# Altium PCB BaseMod_V2.PcbDoc (part 2 of 2)
Units mm, origin at the board's own origin, x right, y up, seen from the top; angles counter-clockwise.
Board outline 100 x 94 mm, 2 copper layers (Top Layer, Bottom Layer), stack 1.069 mm thick; 165 components, 135 nets, 648 pads, 250 vias.
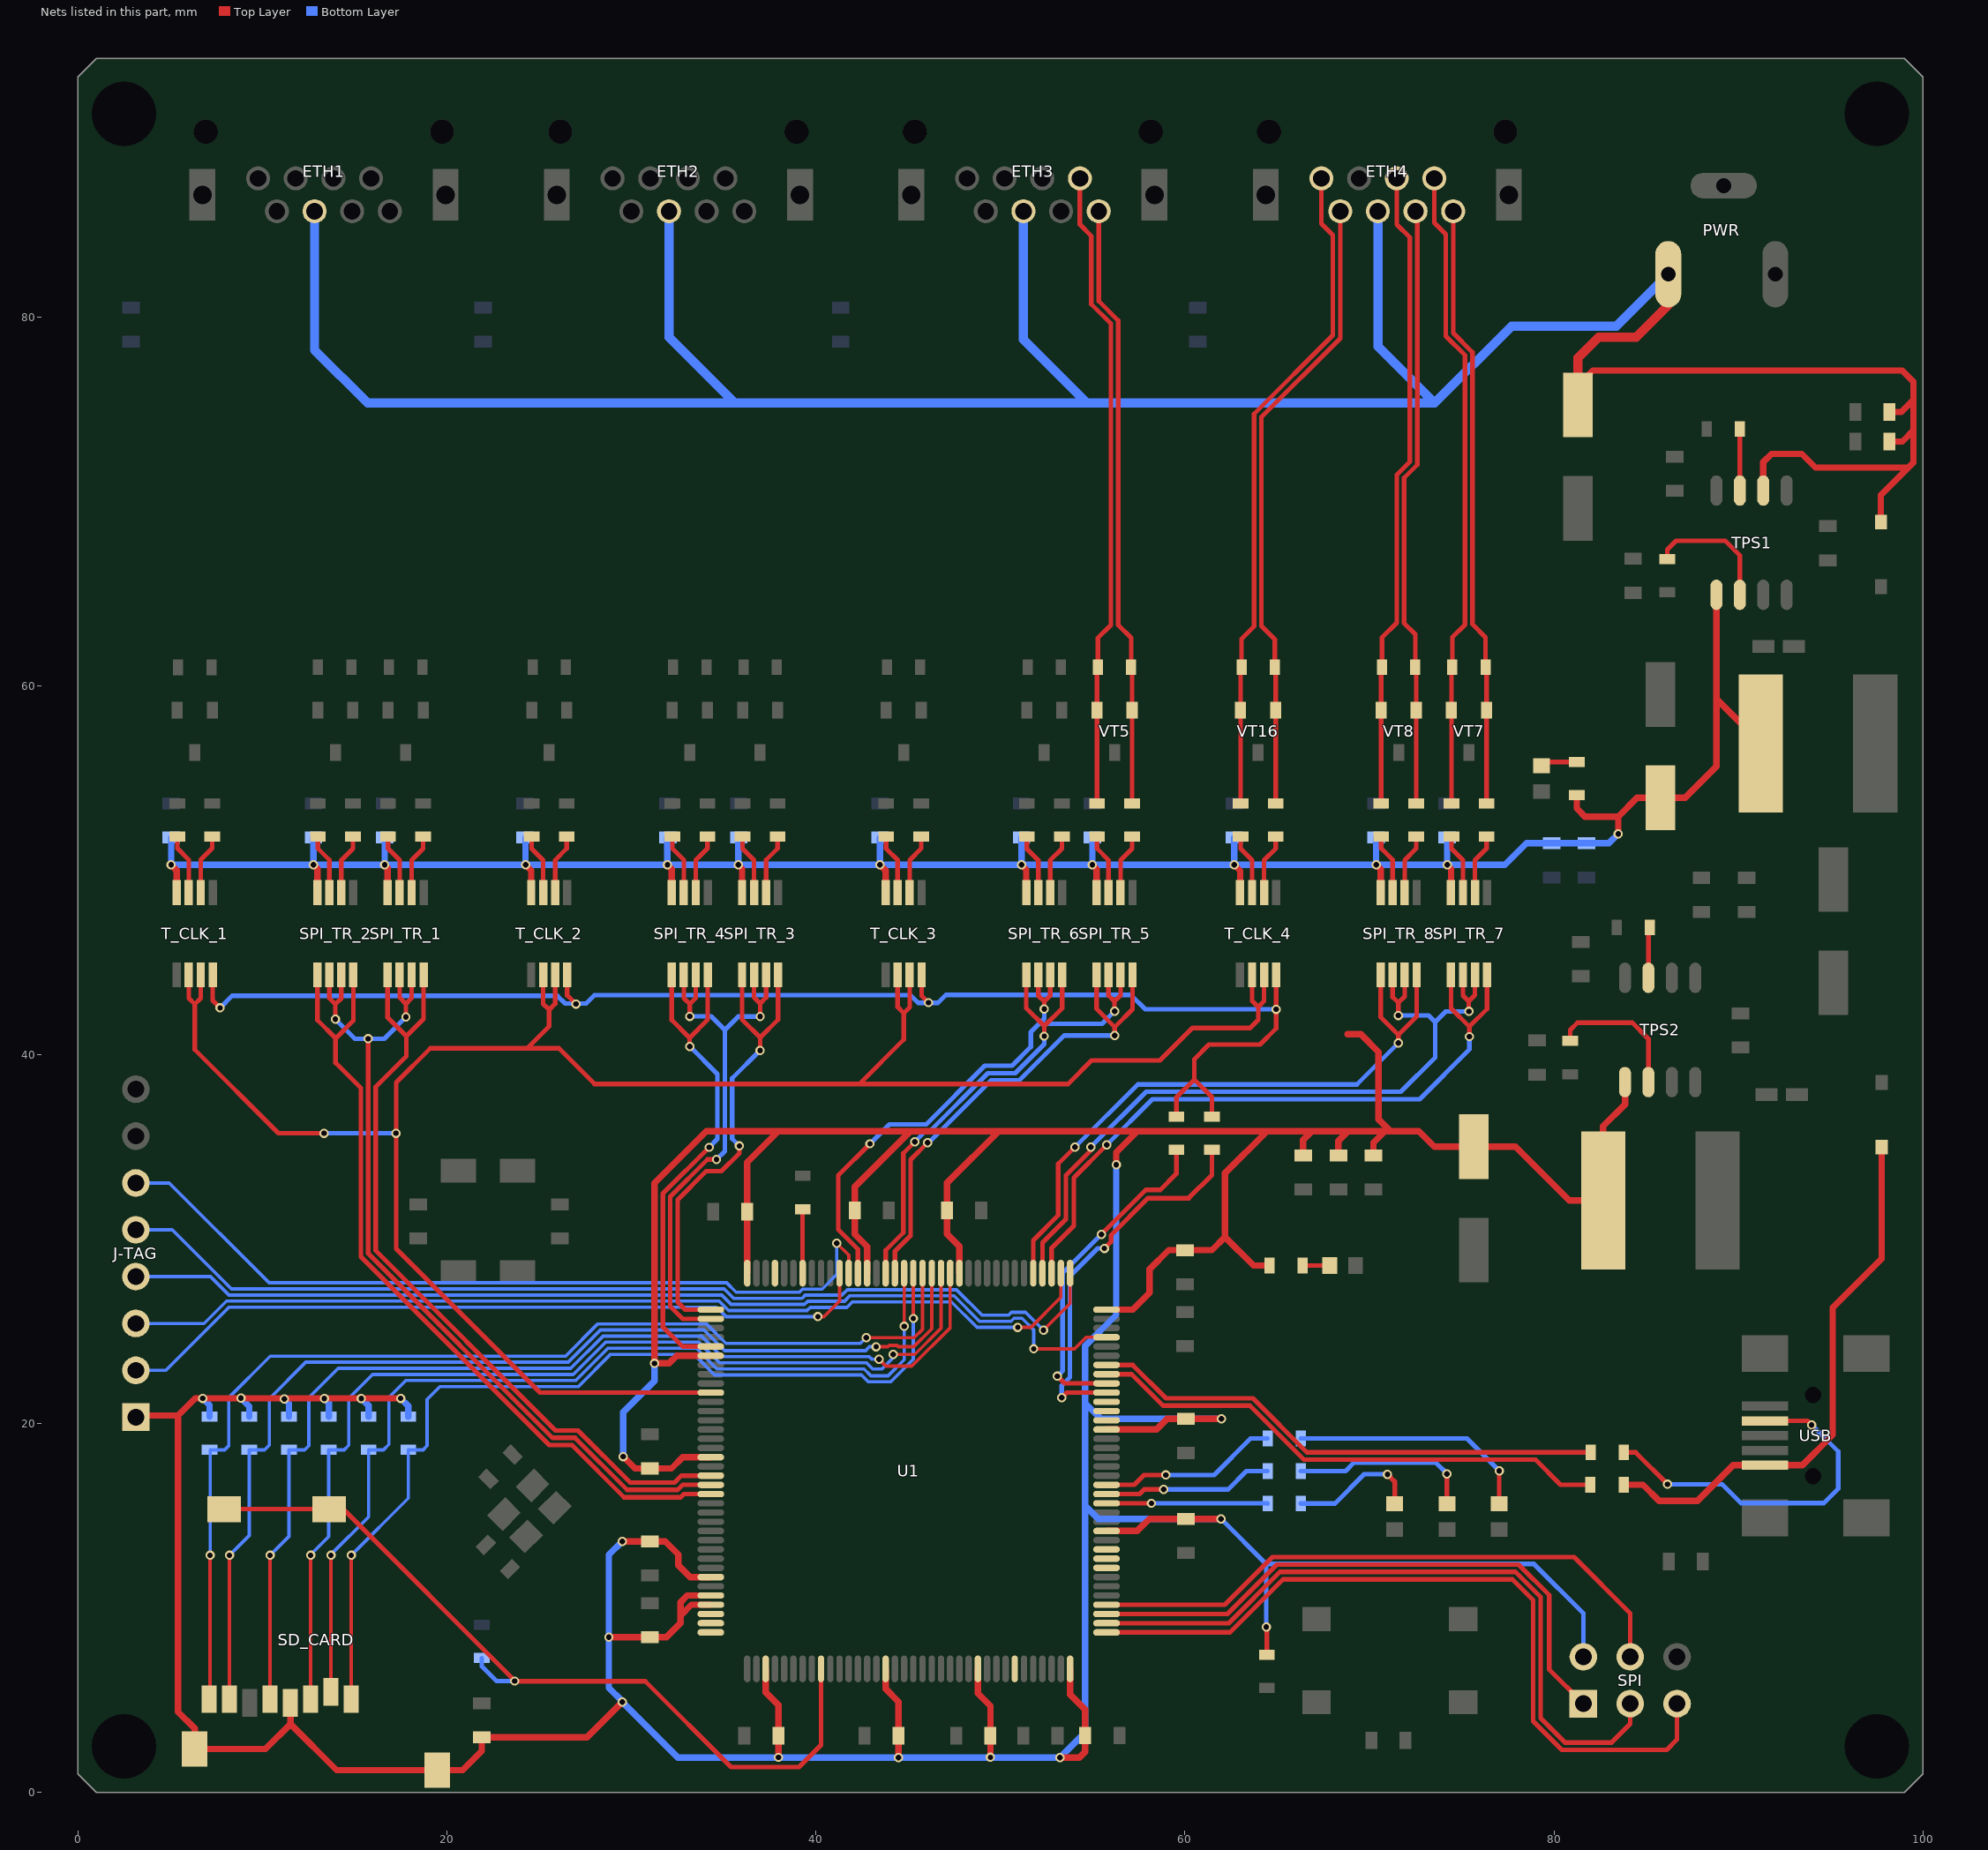
[diagram p2: the nets of this part, all layers, seen from the top]

## Via types
v1: diameter 0.5, hole 0.3, Top Layer to Bottom Layer, tented both sides, 250 vias

## Nets (pads, with @x,y where several pads share a name; then routed paths per layer and width w, separated by ;. In a path a pad name is that pad's centre, name@x,y a point inside that pad or via, vN(x,y) a via of type N, cw(c..) or ccw(c..) an arc to the next point about the centre after c; other vN are vias at no path point) (continued)
NetETH3_7: ETH3.7 Rt9.1 Rt21.2 VT5.2 | length 34.8
  Top Layer w0.25: ETH3.7@54.309,87.502 54.309,84.996 54.929,84.376 54.929,80.687 55.985,79.63 55.985,63.286 55.287,62.588 Rt21.2@55.287,60.999 ; Rt9.1@55.237,53.614 VT5.2@55.237,58.675 Rt21.2@55.237,60.949
NetETH3_8: ETH3.8 Rt10.1 Rt21.1 VT5.1 | length 32.8
  Top Layer w0.25: ETH3.8@55.329,85.722 55.329,80.852 56.385,79.796 56.385,63.289 57.087,62.587 Rt21.1@57.087,60.999 ; Rt10.1@57.137,53.614 VT5.1@57.137,58.675 Rt21.1@57.137,60.949
NetETH4_1: ETH4.1 Rt43.2 Rt48.2 VT16.2 | length 36.1
  Top Layer w0.25: Rt43.2@63.019,53.614 VT16.2@63.019,58.675 Rt48.2@63.019,60.949 ; Rt48.2@63.069,60.999 63.069,62.537 63.75,63.218 63.75,74.732 68.021,79.003 68.021,84.427 67.401,85.047 ETH4.1@67.401,87.502
NetETH4_2: ETH4.2 Rt44.2 Rt48.1 VT16.1 | length 34.1
  Top Layer w0.25: Rt48.1@64.869,60.999 64.869,62.519 64.15,63.238 64.15,74.566 68.421,78.837 ETH4.2@68.421,85.722 ; Rt44.2@64.919,53.614 VT16.1@64.919,58.675 Rt48.1@64.919,60.949
NetETH4_5: ETH4.5 Rt15.1 Rt24.2 VT8.2 | length 34.8
  Top Layer w0.25: Rt15.1@70.639,53.616 VT8.2@70.639,58.675 Rt24.2@70.639,60.949 ; Rt24.2@70.689,60.999 70.689,62.612 71.481,63.404 71.481,71.429 72.196,72.144 72.196,84.292 71.481,85.007 ETH4.5@71.481,87.502
NetETH4_6: ETH4.6 Rt16.1 Rt24.1 VT8.1 | length 32.6
  Top Layer w0.25: Rt24.1@72.489,60.999 72.489,62.779 71.881,63.387 71.881,71.263 72.596,71.978 72.596,85.627 ETH4.6@72.501,85.722 ; Rt16.1@72.539,53.616 VT8.1@72.539,58.675 Rt24.1@72.539,60.949
NetETH4_7: ETH4.7 Rt13.1 Rt23.2 VT7.2 | length 34.8
  Top Layer w0.25: ETH4.7@73.521,87.502 73.521,85.1 74.141,84.48 74.141,78.952 75.185,77.908 75.185,63.313 74.499,62.627 Rt23.2@74.499,60.999 ; Rt13.1@74.449,53.614 VT7.2@74.449,58.675 Rt23.2@74.449,60.949
NetETH4_8: ETH4.8 Rt14.1 Rt23.1 VT7.1 | length 32.8
  Top Layer w0.25: ETH4.8@74.541,85.722 74.541,79.118 75.585,78.074 75.585,63.335 76.299,62.621 Rt23.1@76.299,60.999 ; Rt14.1@76.349,53.614 VT7.1@76.349,58.675 Rt23.1@76.349,60.949
NetJ-TAG_2: J-TAG.2 U1.134 | length 41.6
  Top Layer w0.18: v1(40.107,25.794) 40.43,25.794 41.279,26.643 U1.134@41.279,28.149
  Bottom Layer w0.18: J-TAG.2@3.137,22.882 4.764,22.882 8.187,26.305 34.619,26.305 35.13,25.794 v1(40.107,25.794)
NetJ-TAG_3: J-TAG.3 U1.110 | length 53.6
  Top Layer w0.18: v1(50.94,25.213) 51.656,25.213 53.279,26.836 U1.110@53.279,28.149
  Bottom Layer w0.18: J-TAG.3@3.137,25.422 6.837,25.422 8.05,26.635 34.756,26.635 35.267,26.124 39.517,26.124 39.691,26.298 41.679,26.298 41.974,26.593 47.348,26.593 48.728,25.213 v1(50.94,25.213)
NetJ-TAG_4: J-TAG.4 U1.105 | length 55.6
  Top Layer w0.18: v1(51.805,24.048) 54.021,24.048 54.647,24.674 U1.105@55.754,24.674
  Bottom Layer w0.18: J-TAG.4@3.137,27.962 7.182,27.962 8.179,26.965 34.892,26.965 35.403,26.454 39.38,26.454 39.554,26.628 41.542,26.628 41.837,26.923 47.485,26.923 48.865,25.543 50.577,25.543 50.737,25.703 51.172,25.703 51.805,25.07 v1(51.805,24.048)
NetJ-TAG_5: J-TAG.5 U1.109 | length 55.7
  Top Layer w0.18: v1(52.334,25.063) 53.779,26.508 U1.109@53.779,28.149
  Bottom Layer w0.18: J-TAG.5@3.137,30.502 5.109,30.502 8.316,27.295 35.029,27.295 35.54,26.784 39.244,26.784 39.418,26.958 41.406,26.958 41.701,27.253 47.621,27.253 49.001,25.873 50.44,25.873 50.6,26.033 51.364,26.033 v1(52.334,25.063)
NetJ-TAG_6: J-TAG.6 U1.133 | length 44.4
  Top Layer w0.18: v1(41.131,29.772) 41.779,29.124 U1.133@41.779,28.149
  Bottom Layer w0.18: J-TAG.6@3.137,33.042 4.946,33.042 10.363,27.625 35.166,27.625 35.677,27.114 39.107,27.114 39.281,27.288 40.336,27.288 41.131,28.083 v1(41.131,29.772)
NetL1_1: L1.1 RL1.2 | length 7.1
  Top Layer w0.25: v1(70.981,17.247) 71.374,16.854 L1.1@71.374,15.655
  Bottom Layer w0.25: RL1.2@66.284,15.662 68.135,15.662 69.72,17.247 v1(70.981,17.247)
NetL2_1: L2.1 RL2.2 | length 10
  Top Layer w0.25: L2.1@74.206,15.655 v1(74.206,17.269)
  Bottom Layer w0.25: RL2.2@66.284,17.423 68.709,17.423 69.157,17.871 73.604,17.871 v1(74.206,17.269)
NetL3_1: L3.1 RL3.2 | length 13.3
  Top Layer w0.25: L3.1@77.037,15.655 v1(77.037,17.436)
  Bottom Layer w0.25: RL3.2@66.284,19.185 75.288,19.185 v1(77.037,17.436)
NetLp1_1: Lp1.1 Rp3.1 | length 1.7
  Top Layer w0.25: Lp1.1@79.525,55.857 Rp3.1@81.244,55.857
NetLp2_1: Lp2.1 Rp6.1 | length 1.5
  Top Layer w0.25: Rp6.1@66.382,28.568 Lp2.1@67.853,28.568
NetRb0_1: Rb0.1 U1.138 | length 3.5
  Top Layer w0.25: U1.138@39.279,28.149 Rb0.1@39.279,31.624
NetRd1_1: Rd1.1 SD_CARD.1 U1.126 | length 51.6
  Top Layer w0.18: SD_CARD.1@14.815,5.057 v1(14.815,12.855) ; v1(45.279,25.695) U1.126@45.279,28.149
  Bottom Layer w0.18: v1(14.815,12.855) 17.905,15.945 Rd1.1@17.905,18.572 18.706,18.572 18.927,18.793 18.927,21.306 19.624,22.003 27.121,22.003 28.868,23.75 33.384,23.75 34.504,22.63 42.463,22.63 42.833,22.26 44.052,22.26 45.279,23.487 45.279,24.773 v1(45.279,25.695)
NetRd2_1: Rd2.1 SD_CARD.2 U1.127 | length 52.4
  Top Layer w0.18: SD_CARD.2@13.715,5.457 v1(13.715,12.855) ; U1.127@44.779,28.149 44.788,28.14 v1(44.788,25.266)
  Bottom Layer w0.18: v1@13.715,12.904 15.75,14.939 Rd2.1@15.75,18.572 16.556,18.572 16.855,18.871 16.855,21.42 17.768,22.333 26.984,22.333 28.731,24.08 33.521,24.08 34.641,22.96 42.609,22.96 42.979,22.59 43.916,22.59 44.788,23.462 v1(44.788,25.266)
NetRd3_1: Rd3.1 SD_CARD.3 U1.123 | length 55.6
  Top Layer w0.18: SD_CARD.3@12.615,5.057 v1(12.615,12.855) ; v1(44.188,23.749) 45.363,23.749 46.779,25.165 U1.123@46.779,28.149
  Bottom Layer w0.18: v1@12.597,12.872 13.596,13.871 Rd3.1@13.596,18.572 14.427,18.572 14.675,18.82 14.675,21.366 15.972,22.663 26.848,22.663 28.595,24.41 33.657,24.41 34.777,23.29 42.746,23.29 43.084,22.952 43.581,22.952 44.188,23.559 v1(44.188,23.749)
NetRd4_1: Rd4.1 SD_CARD.5 U1.122 | length 58.3
  Top Layer w0.18: SD_CARD.5@10.415,5.057 v1(10.415,12.855) ; v1(43.423,23.487) 43.796,23.114 45.195,23.114 47.279,25.198 U1.122@47.279,28.149
  Bottom Layer w0.18: v1(10.415,12.855) 11.441,13.881 Rd4.1@11.441,18.572 12.288,18.572 12.512,18.796 12.512,21.4 14.105,22.993 26.711,22.993 28.458,24.74 33.794,24.74 34.914,23.62 42.901,23.62 43.034,23.487 v1(43.423,23.487)
NetRd5_1: Rd5.1 SD_CARD.7 U1.124 | length 59.1
  Top Layer w0.18: SD_CARD.7@8.215,5.057 v1(8.215,12.855) ; v1(43.266,24.16) 43.906,24.16 43.985,24.239 44.391,24.239 44.47,24.16 45.308,24.16 46.279,25.131 U1.124@46.279,28.149
  Bottom Layer w0.18: v1(8.215,12.855) 9.287,13.927 Rd5.1@9.287,18.572 10.107,18.572 10.37,18.835 10.37,21.345 12.348,23.323 26.574,23.323 28.321,25.07 33.931,25.07 35.051,23.95 42.689,23.95 42.899,24.16 v1(43.266,24.16)
NetRd6_1: Rd6.1 SD_CARD.8 U1.125 | length 60.3
  Top Layer w0.18: SD_CARD.8@7.038,5.134 7.161,5.257 v1(7.161,12.855) ; v1(42.723,24.651) 45.332,24.651 45.779,25.098 U1.125@45.779,28.149
  Bottom Layer w0.18: v1@7.132,12.724 v1@7.161,12.695 ; v1@7.165,12.855 7.165,18.563 7.951,18.572 8.179,18.8 8.179,21.414 10.418,23.653 26.438,23.653 28.185,25.4 34.067,25.4 35.126,24.341 42.414,24.341 v1(42.723,24.651)
NetRd7_2: Rd7.2 SD_CARD.10 U1.45 | length 45.3
  Top Layer w0.25: SD_CARD.10@7.925,15.357 SD_CARD.10@13.615,15.357 14.38,15.357 23.709,6.028 30.749,6.028 35.402,1.375 39.086,1.375 40.279,2.568 U1.45@40.279,6.699
  Bottom Layer w0.25: Rd7.2@21.889,7.284 21.889,6.839 22.692,6.036 v1(23.673,6.036)
NetRL1_1: RL1.1 U1.87 | length 8.7
  Top Layer w0.25: U1.87@55.754,15.674 v1(58.188,15.674)
  Bottom Layer w0.25: v1(58.188,15.674) 64.472,15.674 RL1.1@64.484,15.662
NetRL2_1: RL2.1 U1.88 | length 9.2
  Top Layer w0.25: U1.88@55.754,16.174 57.541,16.174 57.789,16.422 v1(58.851,16.422)
  Bottom Layer w0.25: v1(58.851,16.422) 62.336,16.422 63.337,17.423 RL2.1@64.484,17.423
NetRL3_1: RL3.1 U1.89 | length 9.8
  Top Layer w0.25: U1.89@55.754,16.674 57.254,16.674 57.789,17.209 v1(58.964,17.209)
  Bottom Layer w0.25: v1(58.964,17.209) 61.586,17.209 63.562,19.185 RL3.1@64.484,19.185
NetRm1_1: Rm1.1 U1.100 | length 18.2
  Top Layer w0.25: v1(53.089,22.565) 53.48,22.174 U1.100@55.754,22.174 ; v1(55.474,30.256) 57.886,32.668 58.665,32.668 59.537,33.54 Rm1.1@59.537,34.831
  Bottom Layer w0.25: v1(53.089,22.565) 53.369,22.845 53.369,28.151 v1(55.474,30.256)
NetRm1_2: Rm1.2 Rm2.2 T_CLK_1.4 T_CLK_2.4 T_CLK_3.4 T_CLK_4.4 | length 77.9
  Top Layer w0.25: T_CLK_1.4@7.307,44.328 7.307,42.929 v1(7.705,42.531) ; T_CLK_2.4@26.519,44.328 26.519,43.215 v1(26.992,42.742) ; T_CLK_3.4@45.732,44.328 45.732,43.189 v1(46.105,42.816) ; Rm1.2@59.537,36.631 59.537,37.672 60.51,38.645 ; Rm2.2@61.461,36.631 61.461,37.694 60.51,38.645 ; T_CLK_4.4@64.944,44.328 v1(64.944,42.455) 64.944,41.415 64.07,40.541 61.304,40.541 60.51,39.747 60.51,38.645
  Bottom Layer w0.25: v1(7.705,42.531) 8.358,43.184 25.986,43.184 26.403,42.767 v1@26.992,42.767 ; v1(26.992,42.742) v1@26.992,42.767 ; v1@46.105,42.804 45.537,42.804 45.12,43.221 27.996,43.221 27.542,42.767 v1@26.992,42.767 ; v1(46.105,42.816) v1@46.136,42.816 ; v1@46.136,42.804 46.615,42.804 47.043,43.232 57.073,43.232 57.85,42.455 v1(64.944,42.455)
NetRm2_1: Rm2.1 U1.99 | length 20.8
  Top Layer w0.25: v1(53.322,21.401) 53.595,21.674 U1.99@55.754,21.674 ; v1(55.635,29.494) 55.999,29.858 55.999,30.215 58,32.216 60.206,32.216 61.461,33.471 Rm2.1@61.461,34.831
  Bottom Layer w0.25: v1(53.322,21.401) 53.322,22.056 53.769,22.503 53.769,27.985 55.278,29.494 v1(55.635,29.494)
NetRp1_2: Rp1.2 TPS1.3 | length 3.3
  Top Layer w0.25: TPS1.3@90.08,70.579 Rp1.2@90.08,73.904
NetRp2_2: Rp2.2 TPS1.6 | length 7.1
  Top Layer w0.25: Rp2.2@86.148,66.86 86.148,67.373 86.628,67.853 89.292,67.853 90.08,67.065 TPS1.6@90.08,64.929
NetRp4_2: Rp4.2 TPS2.3 | length 2.7
  Top Layer w0.25: TPS2.3@85.125,44.161 Rp4.2@85.125,46.821
NetRp5_2: Rp5.2 TPS2.6 | length 7.7
  Top Layer w0.25: Rp5.2@80.888,40.741 80.888,41.334 81.28,41.726 84.251,41.726 85.125,40.852 TPS2.6@85.125,38.511
NetRt1_2: Rt1.2 SPI_TR_1.7 | length 3.3
  Top Layer w0.25: Rt1.2@16.812,51.814 16.812,51.169 17.437,50.544 SPI_TR_1.7@17.437,48.778
NetRt2_2: Rt2.2 SPI_TR_1.6 | length 3.3
  Top Layer w0.25: SPI_TR_1.6@18.087,48.778 18.087,50.542 18.712,51.167 Rt2.2@18.712,51.814
NetRt3_2: Rt3.2 SPI_TR_2.7 | length 3.3
  Top Layer w0.25: Rt3.2@13.004,51.814 13.004,51.177 13.627,50.554 SPI_TR_2.7@13.627,48.778
NetRt4_2: Rt4.2 SPI_TR_2.6 | length 3.3
  Top Layer w0.25: SPI_TR_2.6@14.277,48.778 14.277,50.543 14.904,51.17 Rt4.2@14.904,51.814
NetRt5_2: Rt5.2 SPI_TR_3.7 | length 3.3
  Top Layer w0.25: Rt5.2@36.024,51.814 36.024,51.163 36.649,50.538 SPI_TR_3.7@36.649,48.778
NetRt6_2: Rt6.2 SPI_TR_3.6 | length 3.3
  Top Layer w0.25: SPI_TR_3.6@37.299,48.778 37.299,50.552 37.924,51.177 Rt6.2@37.924,51.814
NetRt7_2: Rt7.2 SPI_TR_4.7 | length 3.3
  Top Layer w0.25: Rt7.2@32.216,51.814 32.216,51.178 32.839,50.555 SPI_TR_4.7@32.839,48.778
NetRt8_2: Rt8.2 SPI_TR_4.6 | length 3.3
  Top Layer w0.25: SPI_TR_4.6@33.489,48.778 33.489,50.542 34.116,51.169 Rt8.2@34.116,51.814
NetRt9_2: Rt9.2 SPI_TR_5.7 | length 3.3
  Top Layer w0.25: Rt9.2@55.237,51.814 55.237,51.171 55.862,50.546 SPI_TR_5.7@55.862,48.778
NetRt10_2: Rt10.2 SPI_TR_5.6 | length 3.3
  Top Layer w0.25: SPI_TR_5.6@56.512,48.778 56.512,50.543 57.137,51.168 Rt10.2@57.137,51.814
NetRt11_2: Rt11.2 SPI_TR_6.7 | length 3.3
  Top Layer w0.25: Rt11.2@51.429,51.814 51.429,51.167 52.052,50.544 SPI_TR_6.7@52.052,48.778
NetRt12_2: Rt12.2 SPI_TR_6.6 | length 3.3
  Top Layer w0.25: SPI_TR_6.6@52.702,48.778 52.702,50.538 53.329,51.165 Rt12.2@53.329,51.814
NetRt13_2: Rt13.2 SPI_TR_7.7 | length 3.3
  Top Layer w0.25: Rt13.2@74.449,51.814 74.449,51.168 75.074,50.543 SPI_TR_7.7@75.074,48.778
NetRt14_2: Rt14.2 SPI_TR_7.6 | length 3.3
  Top Layer w0.25: SPI_TR_7.6@75.724,48.778 75.724,50.539 76.349,51.164 Rt14.2@76.349,51.814
NetRt15_2: Rt15.2 SPI_TR_8.7 | length 3.3
  Top Layer w0.25: Rt15.2@70.641,51.814 70.641,51.176 71.264,50.553 SPI_TR_8.7@71.264,48.778
NetRt16_2: Rt16.2 SPI_TR_8.6 | length 3.3
  Top Layer w0.25: SPI_TR_8.6@71.914,48.778 71.914,50.544 72.541,51.171 Rt16.2@72.541,51.814
NetRt37_1: Rt37.1 T_CLK_1.7 | length 3.3
  Top Layer w0.25: Rt37.1@5.382,51.81 5.382,51.179 6.007,50.554 T_CLK_1.7@6.007,48.778
NetRt38_1: Rt38.1 T_CLK_1.6 | length 3.3
  Top Layer w0.25: T_CLK_1.6@6.657,48.778 6.657,50.567 7.282,51.192 Rt38.1@7.282,51.81
NetRt39_1: Rt39.1 T_CLK_2.7 | length 3.3
  Top Layer w0.25: Rt39.1@24.594,51.81 24.594,51.165 25.219,50.54 T_CLK_2.7@25.219,48.778
NetRt40_1: Rt40.1 T_CLK_2.6 | length 3.3
  Top Layer w0.25: T_CLK_2.6@25.869,48.778 25.869,50.546 26.494,51.171 Rt40.1@26.494,51.81
NetRt41_1: Rt41.1 T_CLK_3.7 | length 3.3
  Top Layer w0.25: Rt41.1@43.807,51.81 43.807,51.169 44.432,50.544 T_CLK_3.7@44.432,48.778
NetRt42_1: Rt42.1 T_CLK_3.6 | length 3.3
  Top Layer w0.25: T_CLK_3.6@45.082,48.778 45.082,50.546 45.707,51.171 Rt42.1@45.707,51.81
NetRt43_1: Rt43.1 T_CLK_4.7 | length 3.3
  Top Layer w0.25: Rt43.1@63.019,51.81 63.019,51.159 63.644,50.534 T_CLK_4.7@63.644,48.778
NetRt44_1: Rt44.1 T_CLK_4.6 | length 3.3
  Top Layer w0.25: T_CLK_4.6@64.294,48.778 64.294,50.536 64.919,51.161 Rt44.1@64.919,51.81
NetRu1_1: Ru1.1 U1.101 | length 28.7
  Top Layer w0.25: U1.101@55.754,22.674 57.103,22.674 58.808,20.969 63.518,20.969 66.45,18.037 79.004,18.037 80.359,16.682 Ru1.1@81.981,16.682
NetRu2_1: Ru2.1 U1.102 | length 28.2
  Top Layer w0.25: U1.102@55.754,23.174 57.169,23.174 58.974,21.369 63.684,21.369 66.616,18.437 Ru2.1@81.997,18.437
NetRu2_2: Ru2.2 USB.4 | length 19.7
  Top Layer w0.25: Ru2.2@83.797,18.437 84.431,18.437 v1(86.164,16.704) ; USB.4@91.447,20.141 93.751,20.141 v1(93.968,19.924)
  Bottom Layer w0.25: v1(86.164,16.704) 89.12,16.704 90.141,15.683 94.633,15.683 95.41,16.46 95.41,18.482 v1(93.968,19.924)
NetSAI2_AB_1: U1.81
NetSAI2_AB_3: U1.80
NetSAI2_AB_4: U1.82
NetSAI2_AB_5: U1.141
NetSAI2_AB_7: U1.66
NetSAI2_AB_9: U1.34
NetSAI2_AB_10: U1.36
NetSAI2_AB_11: U1.35
NetSPI_1: SPI.1 U1.75 | length 32.4
  Top Layer w0.25: U1.75@55.754,9.674 62.306,9.674 64.984,12.352 78.088,12.352 79.746,10.694 79.746,6.664 SPI.1@81.598,4.812
NetSPI_3: SPI.3 U1.74 | length 38.7
  Top Layer w0.25: U1.74@55.754,9.174 62.372,9.174 65.15,11.952 77.922,11.952 79.281,10.593 79.281,4.024 80.6,2.705 83.132,2.705 84.138,3.711 SPI.3@84.138,4.812
NetSPI_4: SPI.4 U1.76 | length 33.1
  Top Layer w0.25: U1.76@55.754,10.174 62.165,10.174 64.743,12.752 81.095,12.752 84.138,9.709 SPI.4@84.138,7.352
NetSPI_5: SPI.5 U1.73 | length 42
  Top Layer w0.25: U1.73@55.754,8.674 62.437,8.674 65.315,11.552 77.757,11.552 78.881,10.428 78.881,3.858 80.434,2.305 86.118,2.305 86.678,2.865 SPI.5@86.678,4.812
NetSPI_TR_1_1: SPI_TR_1.1 SPI_TR_1.4 U1.19 | length 43.3
  Top Layer w0.25: SPI_TR_1.1@16.787,44.328 16.787,42.005 17.795,40.997 ; SPI_TR_1.4@18.737,44.328 18.737,41.939 17.795,40.997 ; U1.19@34.304,17.174 32.713,17.174 32.339,16.8 29.933,16.8 27.107,19.626 25.886,19.626 16.136,29.376 16.136,38.252 17.795,39.911 17.795,40.997
NetSPI_TR_1_2: SPI_TR_1.2 SPI_TR_1.3 SPI_TR_2.2 SPI_TR_2.3 U1.20 | length 48.8
  Top Layer w0.25: SPI_TR_2.2@13.627,44.328 13.627,43.058 13.953,42.732 ; v1(13.953,41.919) 13.953,42.732 ; SPI_TR_2.3@14.277,44.328 14.277,43.055 13.953,42.732 ; v1(15.736,40.861) 15.736,29.21 25.72,19.226 26.941,19.226 29.767,16.4 32.505,16.4 32.779,16.674 U1.20@34.304,16.674 ; SPI_TR_1.2@17.437,44.328 17.437,43.092 17.776,42.753 ; v1(17.776,42.036) 17.776,42.753 ; SPI_TR_1.3@18.087,44.328 18.087,43.064 17.776,42.753
  Bottom Layer w0.25: v1(13.953,41.919) 15.011,40.861 v1(15.736,40.861) 16.601,40.861 v1(17.776,42.036)
NetSPI_TR_2_1: SPI_TR_2.1 SPI_TR_2.4 U1.21 | length 44.5
  Top Layer w0.25: SPI_TR_2.1@12.977,44.328 12.977,41.874 13.966,40.885 ; SPI_TR_2.4@14.927,44.328 14.927,41.846 13.966,40.885 ; U1.21@34.304,16.174 32.844,16.174 32.67,16 29.602,16 26.776,18.826 25.555,18.826 15.336,29.045 15.336,38.186 13.966,39.556 13.966,40.885
NetSPI_TR_3_1: SPI_TR_3.1 SPI_TR_3.4 U1.1 | length 26.6
  Top Layer w0.25: U1.1@34.304,26.174 32.906,26.174 32.5,26.58 32.5,32.127 34.051,33.678 34.879,33.678 35.852,34.651 v1(35.852,35.047) ; SPI_TR_3.1@35.999,44.328 35.999,41.898 36.975,40.922 ; v1(36.975,40.227) 36.975,40.922 ; SPI_TR_3.4@37.949,44.328 37.949,41.896 36.975,40.922
  Bottom Layer w0.25: v1(35.852,35.047) 35.463,35.436 35.463,38.715 v1(36.975,40.227)
NetSPI_TR_3_2: SPI_TR_3.2 SPI_TR_3.3 SPI_TR_4.2 SPI_TR_4.3 U1.2 | length 31.6
  Top Layer w0.25: SPI_TR_4.2@32.839,44.328 32.839,43.061 33.161,42.739 ; v1(33.161,42.074) 33.161,42.739 ; SPI_TR_4.3@33.489,44.328 33.489,43.067 33.161,42.739 ; U1.2@34.304,25.674 32.78,25.674 32.1,26.354 32.1,32.292 34.121,34.313 v1(34.611,34.313) ; SPI_TR_3.2@36.649,44.328 36.649,43.103 36.978,42.774 ; v1(36.978,42.059) 36.978,42.774 ; SPI_TR_3.3@37.299,44.328 37.299,43.096 36.978,42.774
  Bottom Layer w0.25: v1(33.161,42.074) 34.324,42.074 35.061,41.337 ; v1(34.611,34.313) 35.062,34.764 35.062,41.336 ; v1(36.978,42.059) 35.783,42.059 35.061,41.337
NetSPI_TR_4_1: SPI_TR_4.1 SPI_TR_4.4 U1.5 | length 28.2
  Top Layer w0.25: SPI_TR_4.1@32.189,44.328 32.189,41.869 33.15,40.908 ; v1(33.169,40.439) 33.15,40.458 33.15,40.908 ; SPI_TR_4.4@34.139,44.328 34.139,41.897 33.15,40.908 ; v1(34.215,34.973) 31.7,32.458 31.7,25.245 32.771,24.174 U1.5@34.304,24.174
  Bottom Layer w0.25: v1(33.169,40.439) 34.662,38.946 34.662,35.42 v1(34.215,34.973)
NetSPI_TR_5_1: SPI_TR_5.1 SPI_TR_5.4 U1.128 | length 27.3
  Top Layer w0.25: U1.128@44.279,28.149 44.279,29.325 45.137,30.183 45.137,34.305 v1(46.053,35.221) ; SPI_TR_5.1@55.212,44.328 55.212,42.476 56.195,41.493 ; v1(56.195,41.032) 56.195,41.493 ; SPI_TR_5.4@57.162,44.328 57.162,42.46 56.195,41.493
  Bottom Layer w0.25: v1(46.053,35.221) 46.114,35.221 49.488,38.595 51.017,38.595 53.454,41.032 v1(56.195,41.032)
NetSPI_TR_5_2: SPI_TR_5.2 SPI_TR_5.3 SPI_TR_6.2 SPI_TR_6.3 U1.132 | length 33.1
  Top Layer w0.25: U1.132@42.279,28.149 42.279,29.452 41.217,30.514 41.217,33.451 v1(42.93,35.164) ; SPI_TR_6.2@52.052,44.328 52.052,43.202 52.376,42.877 ; v1(52.376,42.472) 52.376,42.877 ; SPI_TR_6.3@52.702,44.328 52.702,43.203 52.376,42.877 ; SPI_TR_5.2@55.862,44.328 55.862,43.211 56.188,42.886 ; v1(56.188,42.352) 56.188,42.886 ; SPI_TR_5.3@56.512,44.328 56.512,43.21 56.188,42.886
  Bottom Layer w0.25: v1(42.93,35.164) 43.988,36.222 45.984,36.222 49.157,39.395 50.63,39.395 51.645,40.41 51.645,41.217 52.096,41.668 ; v1(52.376,42.472) 52.376,41.948 52.096,41.668 ; v1(56.188,42.352) 55.504,41.668 52.096,41.668
NetSPI_TR_6_1: SPI_TR_6.1 SPI_TR_6.4 U1.129 | length 24.3
  Top Layer w0.25: U1.129@43.779,28.149 43.779,29.391 44.737,30.349 44.737,34.648 v1(45.359,35.271) ; SPI_TR_6.1@51.402,44.328 51.402,42.519 52.376,41.545 ; v1(52.376,41) 52.376,41.545 ; SPI_TR_6.4@53.352,44.328 53.352,42.521 52.376,41.545
  Bottom Layer w0.25: v1(45.359,35.271) 45.91,35.822 46.149,35.822 49.323,38.995 50.797,38.995 52.376,40.574 v1(52.376,41)
NetSPI_TR_7_1: SPI_TR_7.1 SPI_TR_7.4 U1.111 | length 37.7
  Top Layer w0.25: U1.111@52.779,28.149 52.779,29.523 53.98,30.724 53.98,33.321 v1(55.763,35.104) ; SPI_TR_7.1@74.424,44.328 74.424,42.513 75.424,41.513 ; v1(75.424,40.975) 75.424,41.513 ; SPI_TR_7.4@76.374,44.328 76.374,42.471 75.424,41.521 75.424,41.513
  Bottom Layer w0.25: v1(55.763,35.104) 58.241,37.582 72.726,37.582 75.424,40.28 v1(75.424,40.975)
NetSPI_TR_7_2: SPI_TR_7.2 SPI_TR_7.3 SPI_TR_8.2 SPI_TR_8.3 U1.112 | length 42.4
  Top Layer w0.25: U1.112@52.279,28.149 52.279,29.8 53.546,31.067 53.546,33.453 54.903,34.809 v1(54.903,34.988) ; SPI_TR_8.2@71.264,44.328 71.264,43.118 71.572,42.81 ; v1(71.572,42.121) 71.572,42.81 ; SPI_TR_8.3@71.914,44.328 71.914,43.152 71.572,42.81 ; SPI_TR_7.2@75.074,44.328 75.074,43.201 75.39,42.885 ; v1(75.39,42.341) 75.39,42.885 ; SPI_TR_7.3@75.724,44.328 75.724,43.219 75.39,42.885
  Bottom Layer w0.25: v1(54.903,34.988) 54.992,35.077 54.993,35.077 57.899,37.982 71.707,37.982 73.561,39.836 73.561,41.769 ; v1(71.572,42.121) 73.209,42.121 73.561,41.769 ; v1(75.39,42.341) 74.133,42.341 73.561,41.769
NetSPI_TR_8_1: SPI_TR_8.1 SPI_TR_8.4 U1.113 | length 35.4
  Top Layer w0.25: U1.113@51.779,28.149 51.779,29.932 53.135,31.288 53.135,34.073 v1(54.044,34.982) ; SPI_TR_8.1@70.614,44.328 70.614,42.03 71.571,41.073 ; v1(71.571,40.629) 71.571,41.073 ; SPI_TR_8.4@72.564,44.328 72.564,42.066 71.571,41.073
  Bottom Layer w0.25: v1(54.044,34.982) 57.444,38.382 69.324,38.382 v1(71.571,40.629)
NetT_CLK_1_2: T_CLK_1.2 T_CLK_1.3 T_CLK_2.2 T_CLK_2.3 T_CLK_3.2 T_CLK_3.3 T_CLK_4.2 T_CLK_4.3 U1.10 | length 118.1
  Top Layer w0.25: T_CLK_1.2@6.007,44.328 6.007,43.058 6.334,42.731 ; T_CLK_1.3@6.657,44.328 6.657,43.054 6.334,42.731 ; v1(13.333,35.735) 10.869,35.735 6.334,40.27 6.334,42.731 ; T_CLK_2.2@25.219,44.328 25.219,42.753 25.539,42.432 ; T_CLK_2.3@25.869,44.328 25.869,42.762 25.539,42.432 ; U1.10@34.304,21.674 25.045,21.674 17.247,29.472 17.247,38.485 19.106,40.344 24.35,40.344 ; T_CLK_3.2@44.432,44.328 44.432,42.582 44.763,42.25 ; T_CLK_3.3@45.082,44.328 45.082,42.569 44.763,42.25 ; T_CLK_4.2@63.644,44.328 63.644,42.908 63.971,42.58 ; T_CLK_4.3@64.294,44.328 64.294,42.903 63.971,42.58 ; 24.35,40.344 26.066,40.344 28.003,38.407 42.352,38.407 ; 24.35,40.344 25.539,41.533 25.539,42.432 ; 42.352,38.407 44.763,40.819 44.763,42.25 ; 42.352,38.407 53.668,38.407 54.94,39.679 58.644,39.679 60.412,41.447 63.54,41.447 63.971,41.878 63.971,42.58
  Bottom Layer w0.25: v1(13.333,35.735) v1(17.232,35.735)
NetU1_96: U1.96
NetU1_97: U1.97
NetU1_98: U1.98
V_CABLE: Cp1.1 Cp2.2 Cp3.2 D3.2 ETH1.4 ETH2.4 ETH3.4 ETH4.4 PWR.1 TPS1.2 | length 171.6
  Top Layer w0.35: Cp1.1@80.736,75.718 81.303,76.285 82.107,77.089 98.875,77.089 99.494,76.47 99.494,75.495 ; TPS1.2@91.35,70.579 91.35,72.121 91.794,72.565 93.44,72.565 94.181,71.824 99.221,71.824 ; D3.2@97.723,68.873 97.723,70.326 99.221,71.824 ; Cp3.2@98.187,73.239 98.89,73.239 99.494,73.843 ; Cp2.2@98.187,74.839 98.838,74.839 99.494,75.495 ; 99.221,71.824 99.494,72.097 99.494,73.843 ; 99.494,73.843 99.494,75.495
  Top Layer w0.5: Cp1.1@81.303,75.213 81.303,76.285 81.303,77.761 82.435,78.893 84.466,78.893 86.202,80.629 PWR.1@86.202,82.31
  Bottom Layer w0.5: ETH1.4@12.824,85.722 12.824,78.206 15.711,75.319 35.608,75.319 ; ETH2.4@32.036,85.722 32.036,78.891 35.608,75.319 ; ETH3.4@51.249,85.722 51.249,78.761 54.691,75.319 ; ETH4.4@70.461,85.722 70.461,78.392 73.534,75.319 ; PWR.1@86.202,82.31 83.386,79.494 77.709,79.494 73.534,75.319 ; 35.608,75.319 54.691,75.319 ; 54.691,75.319 73.534,75.319
VCC: Cc1.2 Cc2.2 Cc3.2 Cc4.2 Cc5.2 Cc6.2 Cc7.2 Cc8.2 Cc9.2 Cc10.2 Cc11.2 Cc12.2 Cc13.2 Cc14.2 Cd.2 Cp16.2 Cp17.2 Cp18.2 J-TAG.1 Lo2.2 Rd1.2 Rd2.2 Rd3.2 Rd4.2 Rd5.2 Rd6.2 Rp6.2 Rr.2 SD_CARD.4 SD_CARD.9 SPI.2 TPS2.5 U1.6 U1.17 U1.30 U1.32 U1.33 U1.39 U1.52 U1.62 U1.72 U1.84 U1.95 U1.108 U1.121 U1.131 U1.144 | length 373.3
  Top Layer w0.254: v1(64.409,8.961) 64.444,8.926 Rr.2@64.444,7.461
  Top Layer w0.35: J-TAG.1@3.23,20.435 5.428,20.435 ; v1@11.173,21.362 8.834,21.362 6.355,21.362 5.428,20.435 ; v1@11.194,21.362 v1(17.49,21.362) ; SD_CARD.4@11.515,4.857 11.515,3.711 ; v1(28.775,8.422) 30.984,8.422 Cc4.2@30.995,8.411 31.89,8.411 32.658,9.179 32.658,9.586 ; v1(29.502,4.898) 27.587,2.983 Cd.2@21.889,2.983 21.889,2.246 20.85,1.207 SD_CARD.9@19.475,1.207 14.019,1.207 11.515,3.711 ; v1(29.502,13.609) Cc3.2@31.002,13.609 31.837,13.609 32.549,12.897 32.549,12.315 33.19,11.674 U1.30@34.304,11.674 ; v1(29.555,18.205) 30.196,17.564 Cc2.2@30.995,17.564 32.169,17.564 32.779,18.174 U1.17@34.304,18.174 ; U1.33@34.304,10.174 33.246,10.174 32.658,9.586 ; U1.32@34.304,10.674 33.022,10.674 32.658,10.31 32.658,9.586 ; U1.6@34.304,23.674 32.456,23.674 32.042,23.26 v1(31.252,23.26) 31.25,23.262 31.25,33.036 34.06,35.846 37.96,35.846 ; Cc1.2@36.276,31.49 36.276,34.162 37.96,35.846 ; U1.144@36.279,28.149 Cc1.2@36.279,31.486 ; U1.39@37.279,6.699 37.279,5.42 37.966,4.733 Cc5.2@37.966,3.077 v1(37.966,1.9) ; U1.131@42.779,28.149 42.779,29.588 42.101,30.266 Cc13.2@42.101,31.558 42.101,32.826 45.121,35.846 ; U1.52@43.779,6.699 43.779,5.614 44.48,4.913 Cc6.2@44.48,3.077 v1(44.48,1.892) ; U1.121@47.779,28.149 47.779,29.6 47.11,30.269 Cc12.2@47.11,31.558 47.11,33.044 49.912,35.846 ; U1.62@48.779,6.699 48.779,5.368 49.459,4.688 Cc7.2@49.459,3.077 v1(49.459,1.905) ; v1(53.229,1.883) 54.283,1.883 54.597,2.197 Cc8.2@54.597,3.084 54.597,4.49 53.779,5.308 U1.72@53.779,6.699 ; U1.84@55.754,14.174 57.42,14.174 58.071,14.825 Cc9.2@60.054,14.825 v1(61.963,14.825) ; U1.95@55.754,19.674 58.469,19.674 59.044,20.249 Cc10.2@60.054,20.249 v1(61.979,20.249) ; U1.108@55.754,26.174 57.169,26.174 58.079,27.084 58.079,28.357 59.12,29.398 Cc11.2@60.011,29.398 61.465,29.398 62.179,30.112 ; v1(56.281,34.028) 56.281,34.701 57.426,35.846 ; Rp6.2@64.582,28.568 63.723,28.568 62.179,30.112 ; Cc14.2@66.408,34.53 66.408,35.374 66.88,35.846 ; Cp18.2@68.324,34.53 68.324,35.317 68.853,35.846 ; 68.818,41.103 69.536,41.103 70.501,40.138 70.501,36.494 71.149,35.846 ; Cp17.2@70.222,34.53 70.222,35.225 70.843,35.846 ; TPS2.5@83.855,38.511 83.855,37.303 82.673,36.121 Lo2.2@82.673,32.088 80.841,32.088 77.922,35.007 Cp16.2@75.65,35.007 73.518,35.007 72.679,35.846 71.149,35.846 ; 5.428,20.435 5.428,4.365 6.325,3.468 SD_CARD.9@6.325,2.357 10.161,2.357 11.515,3.711 ; 37.96,35.846 45.121,35.846 ; 45.121,35.846 49.912,35.846 ; 49.912,35.846 49.938,35.846 52.961,35.846 57.426,35.846 ; 57.426,35.846 64.457,35.846 ; 62.179,30.112 62.179,33.568 64.457,35.846 ; 64.457,35.846 66.88,35.846 ; 66.88,35.846 68.853,35.846 ; 68.853,35.846 70.843,35.846 ; 70.843,35.846 71.149,35.846
  Bottom Layer w0.254: v1(61.963,14.825) 64.409,12.379 ; v1(64.409,8.961) 64.409,12.379 ; SPI.2@81.598,7.352 81.598,9.708 78.927,12.379 64.409,12.379
  Bottom Layer w0.35: v1(6.757,21.364) 7.132,20.989 Rd6.2@7.132,20.372 ; v1(8.834,21.376) 9.287,20.923 Rd5.2@9.287,20.372 ; v1(11.194,21.334) 11.441,21.087 Rd4.2@11.441,20.372 ; v1(13.355,21.355) 13.596,21.114 Rd3.2@13.596,20.372 ; v1(15.359,21.356) 15.75,20.965 Rd2.2@15.75,20.372 ; v1(17.49,21.362) 17.905,20.947 Rd1.2@17.905,20.372 ; v1(29.502,4.898) 32.517,1.883 32.559,1.883 37.966,1.884 44.48,1.886 49.459,1.887 53.224,1.889 54.591,3.256 54.591,15.54 ; v1(29.502,13.609) 28.775,12.882 v1(28.775,8.422) 28.775,5.667 v1@29.523,4.919 ; v1(29.555,18.205) 29.555,20.611 31.252,22.308 v1(31.252,23.26) ; v1(56.281,34.028) 56.281,25.888 54.591,24.198 54.591,21.105 ; v1(61.963,14.825) 55.306,14.825 54.591,15.54 ; v1(61.979,20.249) 55.447,20.249 54.591,21.105 ; 54.591,15.54 54.591,21.105
VCC_RS: Cp13.2 Cp14.2 Cp15.2 Ct1.2 Ct2.2 Ct3.2 Ct4.2 Ct5.2 Ct6.2 Ct7.2 Ct8.2 Ct13.2 Ct14.2 Ct15.2 Ct16.2 Lo1.2 Rp3.2 SPI_TR_1.8 SPI_TR_2.8 SPI_TR_3.8 SPI_TR_4.8 SPI_TR_5.8 SPI_TR_6.8 SPI_TR_7.8 SPI_TR_8.8 T_CLK_1.8 T_CLK_2.8 T_CLK_3.8 T_CLK_4.8 TPS1.5 | length 139.4
  Top Layer w0.35: v1(5.049,50.29) 5.357,49.982 T_CLK_1.8@5.357,48.778 ; v1(12.766,50.29) 12.977,50.079 SPI_TR_2.8@12.977,48.778 ; v1(16.625,50.29) 16.787,50.128 SPI_TR_1.8@16.787,48.778 ; v1(24.264,50.29) 24.569,49.985 T_CLK_2.8@24.569,48.778 ; v1(31.954,50.29) 32.189,50.055 SPI_TR_4.8@32.189,48.778 ; v1(35.799,50.29) 35.999,50.09 SPI_TR_3.8@35.999,48.778 ; v1(43.469,50.29) 43.782,49.977 T_CLK_3.8@43.782,48.778 ; v1(51.146,50.29) 51.402,50.034 SPI_TR_6.8@51.402,48.778 ; v1(54.984,50.29) 55.212,50.062 SPI_TR_5.8@55.212,48.778 ; v1(62.674,50.29) 62.994,49.97 T_CLK_4.8@62.994,48.778 ; v1(70.371,50.29) 70.614,50.047 SPI_TR_8.8@70.614,48.778 ; v1(74.219,50.29) 74.424,50.085 SPI_TR_7.8@74.424,48.778 ; Rp3.2@81.244,54.057 81.244,53.35 81.69,52.904 83.489,52.904 ; v1(83.489,51.961) 83.489,52.904 ; TPS1.5@88.81,64.929 88.81,59.281 ; Lo1.2@91.221,56.87 88.81,59.281 ; 83.489,52.904 84.507,53.922 Cp13.2@85.773,53.922 87.113,53.922 88.81,55.619 88.81,59.281
  Bottom Layer w0.35: Ct16.2@5.049,51.76 v1(5.049,50.29) 8.908,50.29 v1(12.766,50.29) v1(16.625,50.29) v1(24.264,50.29) 28.109,50.29 v1(31.954,50.29) v1(35.799,50.29) v1(43.469,50.29) 47.307,50.29 v1(51.146,50.29) v1(54.984,50.29) v1(62.674,50.29) 66.522,50.29 v1(70.371,50.29) v1(74.219,50.29) 77.348,50.29 78.514,51.456 Cp15.2@79.888,51.456 Cp14.2@81.771,51.456 82.984,51.456 v1(83.489,51.961) ; v1@12.765,50.292 Ct14.2@12.765,51.763 ; v1@16.624,50.291 Ct13.2@16.624,51.763 ; v1@24.259,50.295 Ct15.2@24.259,51.763 ; v1@31.952,50.292 Ct7.2@31.952,51.763 ; v1@35.798,50.291 Ct3.2@35.798,51.763 ; v1@43.47,50.291 Ct8.2@43.47,51.763 ; v1@51.149,50.294 Ct6.2@51.149,51.763 ; v1@54.989,50.295 Ct5.2@54.989,51.763 ; v1@62.676,50.292 Ct4.2@62.676,51.763 ; v1@70.365,50.295 Ct2.2@70.365,51.763 ; v1@74.21,50.299 Ct1.2@74.21,51.763
VCC_USB: D4.2 Ru1.2 USB.1 | length 29.9
  Top Layer w0.35: Ru1.2@83.781,16.682 84.83,16.682 85.705,15.807 87.784,15.807 89.718,17.741 USB.1@91.447,17.741 93.471,17.741 95.111,19.381 95.111,26.279 97.767,28.935 D4.2@97.767,34.989
pads on no net: ETH1. ETH1.9@19.924,86.612 ETH2. ETH2.9@39.136,86.612 ETH3. ETH3.9@58.349,86.612 ETH4. ETH4.9@77.561,86.612 RST.1 RST.2 T_CLK_1.1 T_CLK_2.1 T_CLK_3.1 T_CLK_4.1 U1.3 U1.4 U1.7 U1.11 U1.12 U1.13 U1.14 U1.15 U1.18 U1.22 U1.26 U1.27 U1.28 U1.29 U1.37 U1.40 U1.41 U1.42 U1.43 U1.44 U1.46 U1.47 U1.48 U1.49 U1.50 U1.53 U1.54 U1.55 U1.56 U1.57 U1.58 U1.59 U1.60 U1.63 U1.64 U1.65 U1.67 U1.68 U1.69 U1.70 U1.77 U1.78 U1.79 U1.85 U1.86 U1.90 U1.91 U1.92 U1.93 U1.114 U1.115 U1.116 U1.117 U1.118 U1.119 U1.135 U1.136 U1.137 U1.139 U1.140 U1.142 U1.143 USB. USB.Shell@91.447,23.791 USB.Shell@96.947,14.891 USB.Shell@96.947,23.791
copper on no net:
  other v1: 86.601,75.287

## Polygon pours and split planes (outlines as drawn)
GND on Bottom Layer "GND_BOT" (solid, remove dead copper, pour order 14): 0,98 1,99 99,99 100,98 100,1 99,0 1,0 0,1
GND on Top Layer "GND_TOP" (solid, remove dead copper, pour order 16): 0,98 1,99 99,99 100,98 100,1 99,0 1,0 0,1

## Keep-outs
Keep-Out Layer:
  the board outline again, w0.1

## Other copper
Top Layer:
  pour cut-out: 5.44,16.697 20.599,16.697 20.599,0 5.44,0
  pour cut-out: 32.716,29.778 57.375,29.778 57.375,5.173 32.716,5.173

## Silkscreen, mask and mechanical layers (free items; w line width, h text height)
Top Overlay:
  lines w0.127: 99.49,15.441 99.674,15.625 99.674,15.764
  text "GND" at 6.434,37.822 h0.8
  text "NRST" at 6.434,35.409 h0.8
  text "JTDO / TRACES WO" at 6.234,31.692 h0.8
  text "JTCK / SWCLK" at 6.234,28.824 h0.8
  text "JTMS / SWDIO" at 6.234,26.034 h0.8
  text "JTDI" at 6.434,24.766 h0.8
  text "NJTRST" at 6.434,22.452 h0.8
  text "VCC" at 6.434,20.004 h0.8
  text "VCC" at 79.387,9.355 h0.8
  text "MOSI" at 82.873,9.355 h0.8
  text "GND" at 86.641,9.355 h0.8
  text "CLK" at 83.219,1.862 h0.8
  text "NSS" at 86.468,1.862 h0.8
  text "MISO" at 78.889,1.841 h0.8

## Text inside footprints (layer, text, board x,y; h text height)
PWR: Top Overlay "3" at 89.202,86.11 h0.5 r180; Top Overlay "2" at 91.002,82.51 h0.5 r180; Top Overlay "1" at 87.402,82.51 h0.5 r180
SPI: Top Overlay "1" at 79.566,4.304 h0.7; Top Overlay "2" at 79.058,6.844 h0.7; Top Overlay "5" at 88.202,4.304 h0.7; Top Overlay "6" at 88.202,6.844 h0.7